# EAGLE board Zcontrol5XR2 (EAGLE 5.10)
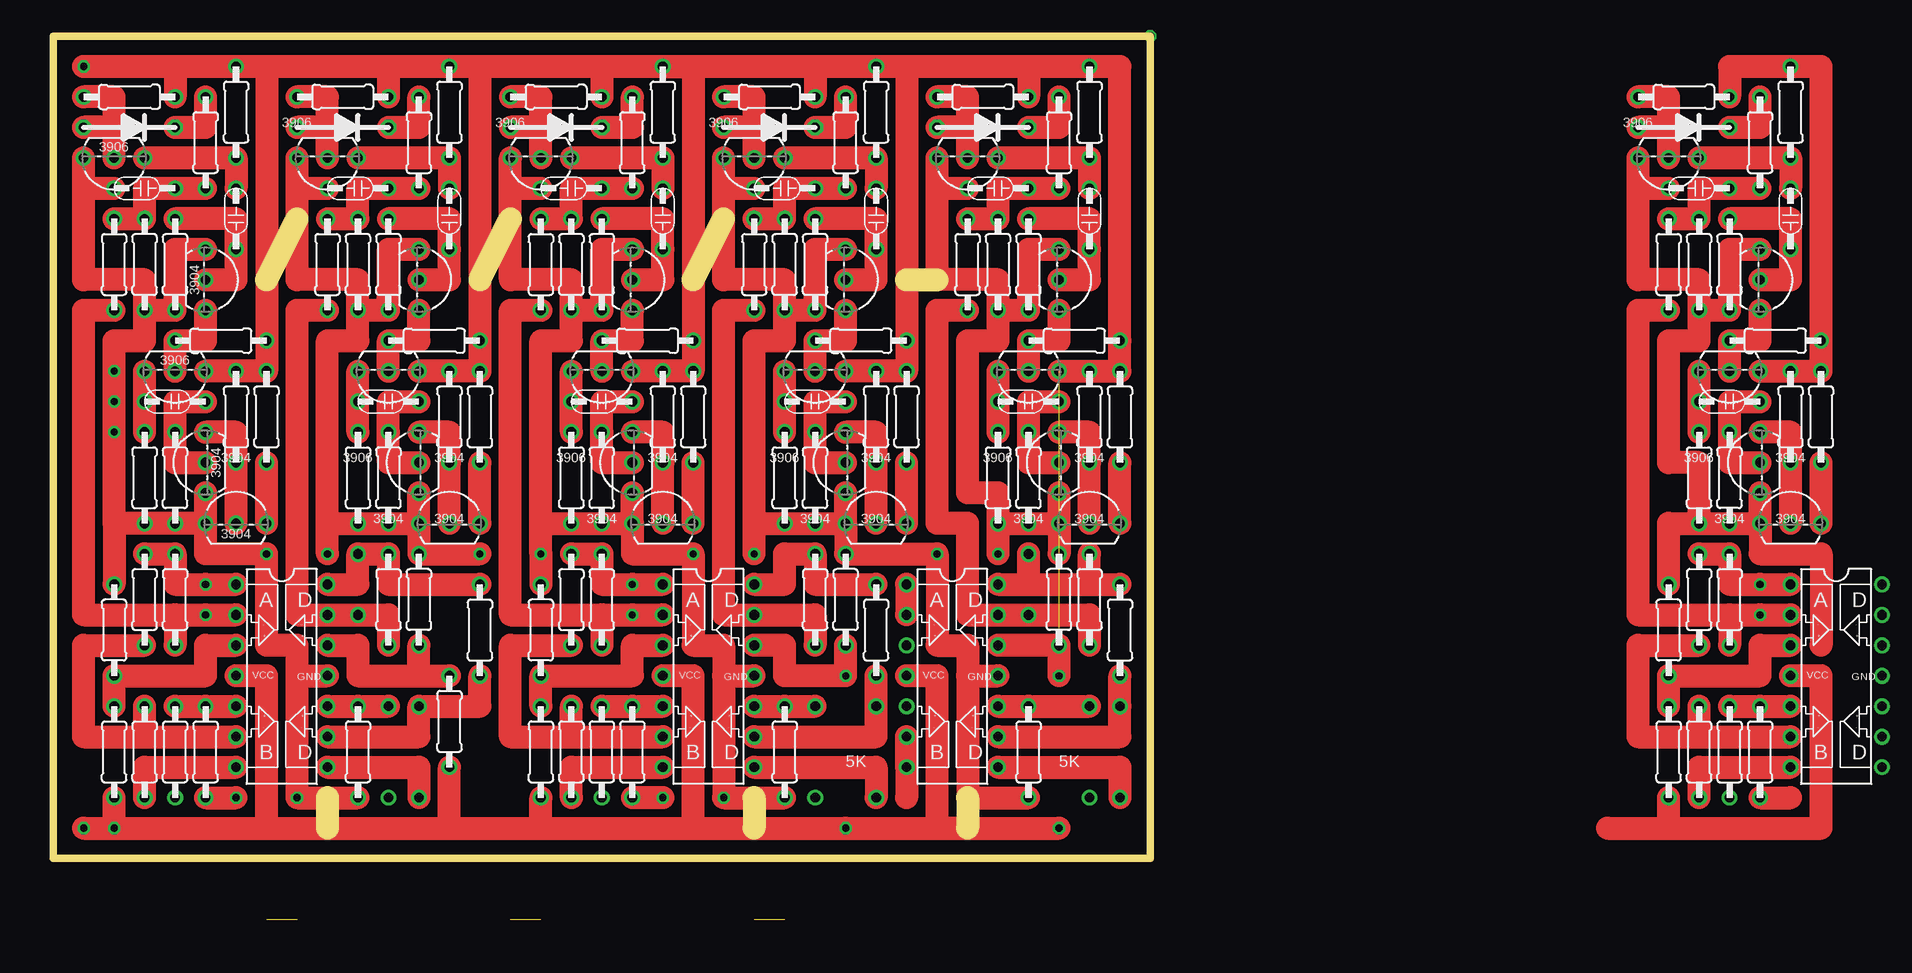
[diagram p0: board, top side]
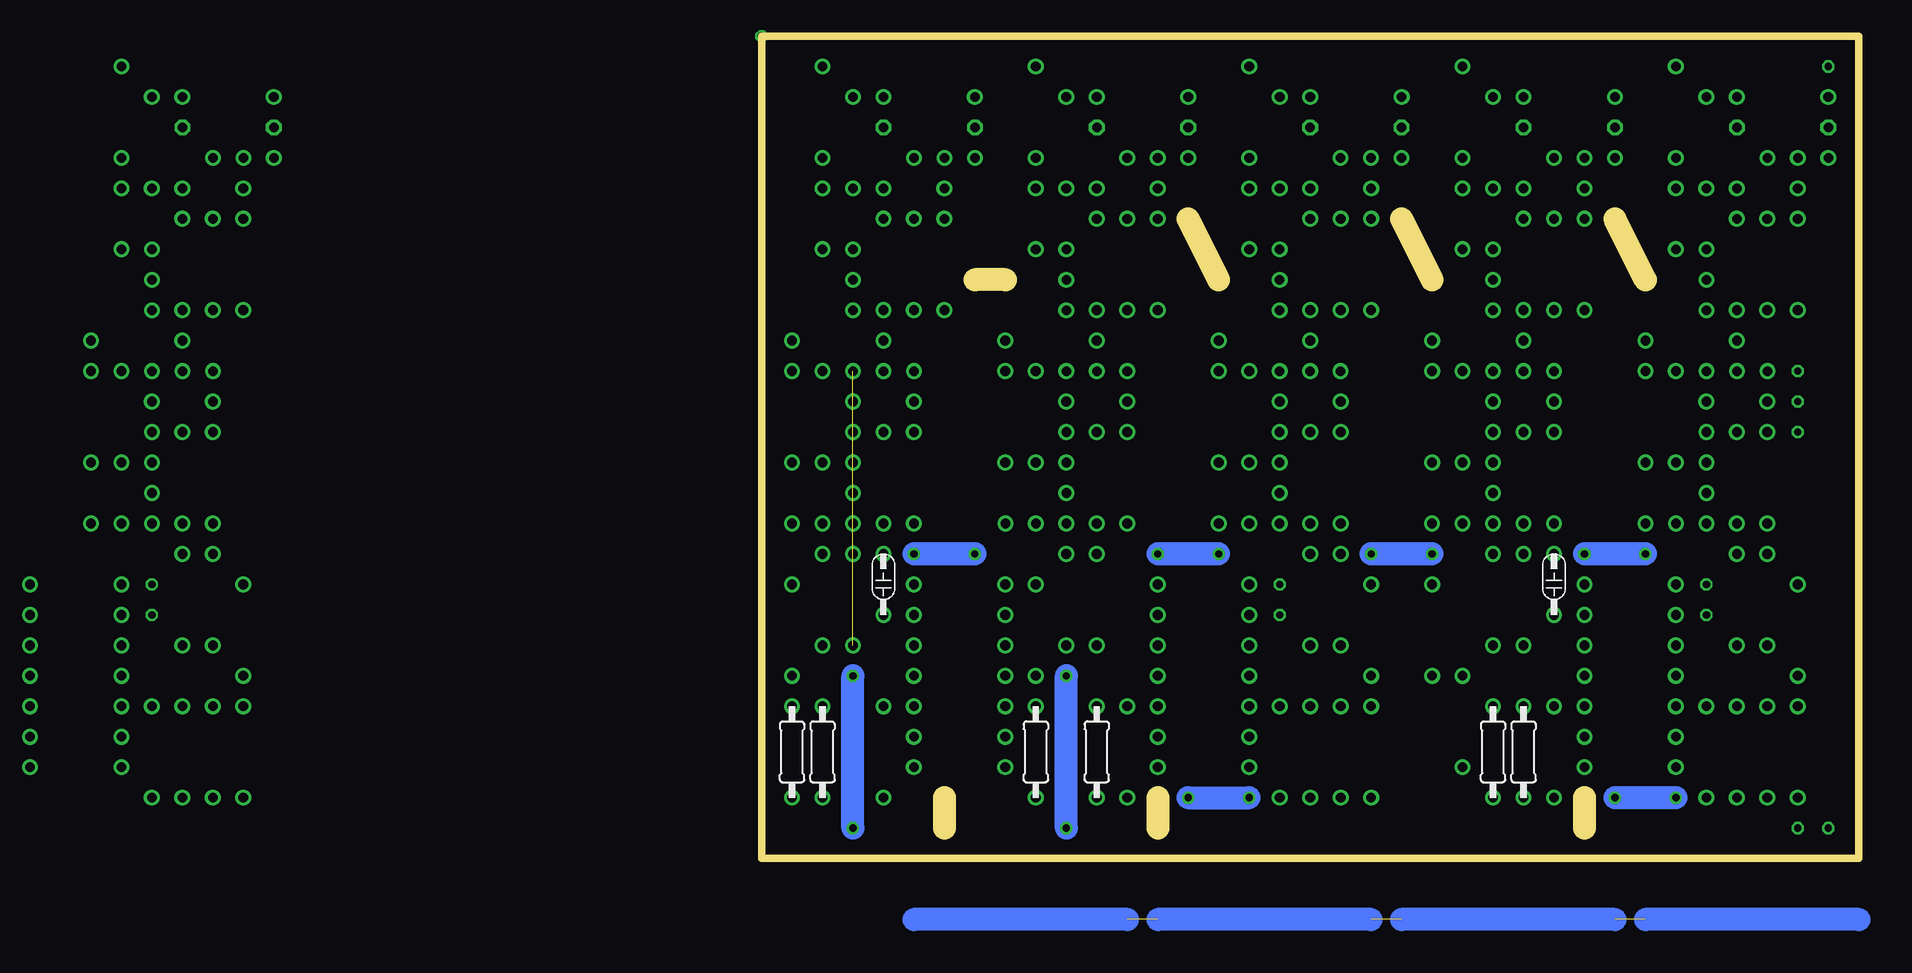
[diagram p1: board, bottom side, seen from below]

Size 91.44 x 68.58 mm. Coordinates in mm from the lower left corner, seen from the top.
Outline: 91.44,0 91.44,68.58 0,68.58 0,0 91.44,0
Copper layers (1*16): Top 0.035mm / dielectric 1.5mm / Bottom 0.035mm
Design rules "default": minimum track width 10mil, minimum drill 24mil, track to track 8mil, track to pad 8mil, pad to pad 8mil, via to via 8mil, smd to smd 8mil, copper to edge 40mil, drill to drill 8mil, minimum pad ring 10mil, minimum via ring 8mil, stop-mask expansion 4mil, vias tented up to drill 0mil, thermal gap 10mil
Milling: 7 lines

## Footprints (pad centres in the part's own frame; a part is rotated, then mirrored left to right if it is on the bottom)
SMALL-CAPACITOR = drill 0.813 round: IN1 0,0; IN2 5.08,0
TRANSISTOR = drill 0.8 round: P$1 0,0; P$2 2.54,0; P$3 -2.54,0
DIODE = drill 0.8 octagon: P$1 -3.81,0; P$2 3.81,0
RESISTOR = drill 0.813 round: IN1 -3.81,0; IN2 3.81,0
LM324-QUAD-OPAMP = drill 0.813 round: AMINUS -3.81,5.08; AOUT -3.81,7.62; APLUS -3.81,2.54; BMINUS -3.81,-5.08; BOUT -3.81,-7.62; BPLUS -3.81,-2.54; CMINUS 3.81,5.08; COUT 3.81,7.62; CPLUS 3.81,2.54; DMINUS 3.81,-5.08; DOUT 3.81,-7.62; DPLUS 3.81,-2.54; GND 3.81,0; VCC -3.81,0
CAPACITOR = drill 0.813 round: IN1 -2.54,0; IN2 5.08,0

## Placement (x,y rotation side)
E$1  [SMALL-CAPACITOR]  35.56,-36.83 270 top  (outside the outline)
E$2  50nF  [SMALL-CAPACITOR]  25.4,20.32 90 bottom
E$3  [TRANSISTOR]  5.08,58.42 180 top
E$4  [TRANSISTOR]  81.28,-39.37 90 top  (outside the outline)
E$5  [DIODE]  6.35,60.96 0 top
E$6  2k  [RESISTOR]  85.09,-31.75 0 top  (outside the outline)
E$7  4k  [RESISTOR]  6.35,63.5 180 top
E$8  10k  [RESISTOR]  87.63,-34.29 0 top  (outside the outline)
E$9  910  [RESISTOR]  12.7,59.69 270 top
E$10  2.2uF  [SMALL-CAPACITOR]  10.16,55.88 180 top
E$11  [LM324-QUAD-OPAMP]  19.05,15.24 0 top
E$12  [RESISTOR]  38.1,-38.1 270 top  (outside the outline)
E$13  [RESISTOR]  50.8,-38.1 270 top  (outside the outline)
E$14  [CAPACITOR]  35.56,-31.75 90 top  (outside the outline)
E$15  100k  [RESISTOR]  7.62,49.53 90 top
E$16  100k  [RESISTOR]  5.08,49.53 270 top
E$17  [CAPACITOR]  53.34,-31.75 90 top  (outside the outline)
E$18  [TRANSISTOR]  22.86,58.42 180 top
E$19  200k  [RESISTOR]  10.16,21.59 270 top
E$20  2k  [RESISTOR]  5.08,19.05 90 top
E$21  5k  [RESISTOR]  5.08,8.89 270 top
E$22  2k  [RESISTOR]  7.62,21.59 270 top
E$23  2k  [RESISTOR]  7.62,8.89 270 top
E$24  [LM324-QUAD-OPAMP]  24.13,-36.83 180 top  (outside the outline)
E$25  [RESISTOR]  17.78,-38.1 270 top  (outside the outline)
E$26  [RESISTOR]  30.48,-38.1 270 top  (outside the outline)
E$27  [CAPACITOR]  15.24,-31.75 90 top  (outside the outline)
E$28  [CAPACITOR]  33.02,-31.75 90 top  (outside the outline)
E$29  2k  [RESISTOR]  12.7,8.89 270 top
E$30  20k  [RESISTOR]  10.16,8.89 270 top
E$31  10K  [RESISTOR]  15.24,62.23 270 top
E$32  500Pf  [SMALL-CAPACITOR]  15.24,50.8 90 top
E$33  100K  [RESISTOR]  10.16,49.53 90 top
E$34  [TRANSISTOR]  12.7,48.26 270 top
E$35  2k  [RESISTOR]  13.97,43.18 0 top
E$36  [TRANSISTOR]  10.16,40.64 180 top
E$37  22Pf  [SMALL-CAPACITOR]  12.7,38.1 180 top
E$38  4k  [RESISTOR]  24.13,63.5 180 top
E$39  2k  [RESISTOR]  69.85,-29.21 180 top  (outside the outline)
E$40  100k  [RESISTOR]  10.16,31.75 90 top
E$41  10k  [RESISTOR]  87.63,-39.37 0 top  (outside the outline)
E$42  10k  [RESISTOR]  87.63,-36.83 0 top  (outside the outline)
E$43  [TRANSISTOR]  12.7,33.02 90 top
E$44  2k  [RESISTOR]  15.24,36.83 90 top
E$45  [TRANSISTOR]  15.24,27.94 0 top
E$46  2k  [RESISTOR]  17.78,36.83 90 top
E$47  200k  [RESISTOR]  27.94,21.59 270 top
E$48  2k  [RESISTOR]  30.48,21.59 90 top
E$49  5k  [RESISTOR]  33.02,11.43 270 top
E$50  2k  [RESISTOR]  35.56,19.05 270 top
E$51  [CAPACITOR]  73.66,-34.29 270 top  (outside the outline)
E$52  2k  [RESISTOR]  30.48,8.89 270 bottom
E$53  2k  [RESISTOR]  25.4,8.89 270 top
E$54  20k  [RESISTOR]  27.94,8.89 270 bottom
E$55  [DIODE]  24.13,60.96 0 top
E$56  910  [RESISTOR]  30.48,59.69 270 top
E$57  2.2uF  [SMALL-CAPACITOR]  27.94,55.88 180 top
E$58  100k  [RESISTOR]  25.4,49.53 90 top
E$59  100k  [RESISTOR]  22.86,49.53 270 top
E$60  10K  [RESISTOR]  33.02,62.23 270 top
E$61  500Pf  [SMALL-CAPACITOR]  33.02,50.8 90 top
E$62  100K  [RESISTOR]  27.94,49.53 90 top
E$63  [TRANSISTOR]  30.48,48.26 270 top
E$64  2k  [RESISTOR]  31.75,43.18 0 top
E$65  [TRANSISTOR]  27.94,40.64 180 top
E$66  100k  [RESISTOR]  27.94,31.75 90 top
E$67  [TRANSISTOR]  30.48,33.02 90 top
E$68  2k  [RESISTOR]  33.02,36.83 90 top
E$69  [TRANSISTOR]  33.02,27.94 0 top
E$70  2k  [RESISTOR]  35.56,36.83 90 top
E$71  2k  [RESISTOR]  25.4,31.75 270 top
E$72  22Pf  [SMALL-CAPACITOR]  30.48,38.1 180 top
E$73  [LM324-QUAD-OPAMP]  54.61,15.24 0 top
E$74  [TRANSISTOR]  40.64,58.42 180 top
E$75  2k  [RESISTOR]  7.62,31.75 270 top
E$76  4k  [RESISTOR]  41.91,63.5 180 top
E$77  [DIODE]  41.91,60.96 0 top
E$78  910  [RESISTOR]  48.26,59.69 270 top
E$79  2.2uF  [SMALL-CAPACITOR]  45.72,55.88 180 top
E$80  100k  [RESISTOR]  43.18,49.53 90 top
E$81  100k  [RESISTOR]  40.64,49.53 270 top
E$82  200k  [RESISTOR]  45.72,21.59 270 top
E$83  2k  [RESISTOR]  40.64,19.05 90 top
E$84  5k  [RESISTOR]  40.64,8.89 270 top
E$85  2k  [RESISTOR]  43.18,21.59 270 top
E$86  2k  [RESISTOR]  43.18,8.89 270 top
E$87  2k  [RESISTOR]  48.26,8.89 270 top
E$88  20k  [RESISTOR]  45.72,8.89 270 top
E$89  10K  [RESISTOR]  50.8,62.23 270 top
E$90  500Pf  [SMALL-CAPACITOR]  50.8,50.8 90 top
E$91  100K  [RESISTOR]  45.72,49.53 90 top
E$92  [TRANSISTOR]  48.26,48.26 270 top
E$93  2k  [RESISTOR]  49.53,43.18 0 top
E$94  [TRANSISTOR]  45.72,40.64 180 top
E$95  100k  [RESISTOR]  45.72,31.75 90 top
E$96  [TRANSISTOR]  48.26,33.02 90 top
E$97  2k  [RESISTOR]  50.8,36.83 90 top
E$98  [TRANSISTOR]  50.8,27.94 0 top
E$99  2k  [RESISTOR]  53.34,36.83 90 top
E$100  200k  [RESISTOR]  86.36,21.59 270 top
E$101  200k  [RESISTOR]  63.5,21.59 270 top
E$102  2k  [RESISTOR]  66.04,21.59 90 top
E$103  [SMALL-CAPACITOR]  30.48,76.2 66.6 top  (outside the outline)
E$104  2k  [RESISTOR]  68.58,19.05 270 top
E$105  2k  [RESISTOR]  68.58,8.89 270 bottom
E$106  2k  [RESISTOR]  60.96,8.89 270 top
E$107  20k  [RESISTOR]  63.5,8.89 270 bottom
E$108  2k  [RESISTOR]  43.18,31.75 270 top
E$109  22Pf  [SMALL-CAPACITOR]  48.26,38.1 180 top
E$110  [TRANSISTOR]  58.42,58.42 180 top
E$111  4k  [RESISTOR]  59.69,63.5 180 top
E$112  [DIODE]  59.69,60.96 0 top
E$113  910  [RESISTOR]  66.04,59.69 270 top
E$114  2.2uF  [SMALL-CAPACITOR]  63.5,55.88 180 top
E$115  100k  [RESISTOR]  60.96,49.53 90 top
E$116  100k  [RESISTOR]  58.42,49.53 270 top
E$117  10K  [RESISTOR]  68.58,62.23 270 top
E$118  500Pf  [SMALL-CAPACITOR]  68.58,50.8 90 top
E$119  100K  [RESISTOR]  63.5,49.53 90 top
E$120  [TRANSISTOR]  66.04,48.26 270 top
E$121  2k  [RESISTOR]  67.31,43.18 0 top
E$122  [TRANSISTOR]  63.5,40.64 180 top
E$123  100k  [RESISTOR]  63.5,31.75 90 top
E$124  [TRANSISTOR]  66.04,33.02 90 top
E$125  2k  [RESISTOR]  68.58,36.83 90 top
E$126  [TRANSISTOR]  68.58,27.94 0 top
E$127  2k  [RESISTOR]  71.12,36.83 90 top
E$128  2k  [RESISTOR]  60.96,31.75 270 top
E$129  22Pf  [SMALL-CAPACITOR]  66.04,38.1 180 top
E$130  [LM324-QUAD-OPAMP]  148.59,15.24 0 top  (outside the outline)
E$131  [TRANSISTOR]  134.62,58.42 180 top  (outside the outline)
E$132  4k  [RESISTOR]  135.89,63.5 180 top  (outside the outline)
E$133  [DIODE]  135.89,60.96 0 top  (outside the outline)
E$134  910  [RESISTOR]  142.24,59.69 270 top  (outside the outline)
E$135  2.2uF  [SMALL-CAPACITOR]  139.7,55.88 180 top  (outside the outline)
E$136  100k  [RESISTOR]  137.16,49.53 90 top  (outside the outline)
E$137  100k  [RESISTOR]  134.62,49.53 270 top  (outside the outline)
E$138  200k  [RESISTOR]  139.7,21.59 270 top  (outside the outline)
E$139  2k  [RESISTOR]  134.62,19.05 90 top  (outside the outline)
E$140  5k  [RESISTOR]  134.62,8.89 270 top  (outside the outline)
E$141  2k  [RESISTOR]  137.16,21.59 270 top  (outside the outline)
E$142  2k  [RESISTOR]  137.16,8.89 270 top  (outside the outline)
E$143  2k  [RESISTOR]  142.24,8.89 270 top  (outside the outline)
E$144  20k  [RESISTOR]  139.7,8.89 270 top  (outside the outline)
E$145  10K  [RESISTOR]  144.78,62.23 270 top  (outside the outline)
E$146  500Pf  [SMALL-CAPACITOR]  144.78,50.8 90 top  (outside the outline)
E$147  100K  [RESISTOR]  139.7,49.53 90 top  (outside the outline)
E$148  [TRANSISTOR]  142.24,48.26 270 top  (outside the outline)
E$149  2k  [RESISTOR]  143.51,43.18 0 top  (outside the outline)
E$150  [TRANSISTOR]  139.7,40.64 180 top  (outside the outline)
E$151  100k  [RESISTOR]  139.7,31.75 90 top  (outside the outline)
E$152  [TRANSISTOR]  142.24,33.02 90 top  (outside the outline)
E$153  2k  [RESISTOR]  144.78,36.83 90 top  (outside the outline)
E$154  [TRANSISTOR]  144.78,27.94 0 top  (outside the outline)
E$155  2k  [RESISTOR]  147.32,36.83 90 top  (outside the outline)
E$156  [LM324-QUAD-OPAMP]  74.93,15.24 0 top
E$157  50nF  [SMALL-CAPACITOR]  81.28,20.32 90 bottom
E$159  2k  [RESISTOR]  83.82,21.59 90 top
E$161  2k  [RESISTOR]  88.9,19.05 270 top
E$162  2k  [RESISTOR]  88.9,8.89 270 bottom
E$163  2k  [RESISTOR]  81.28,8.89 270 top
E$164  2k  [RESISTOR]  137.16,31.75 270 top  (outside the outline)
E$165  22Pf  [SMALL-CAPACITOR]  142.24,38.1 180 top  (outside the outline)
E$166  20k  [RESISTOR]  86.36,8.89 270 bottom
E$167  [TRANSISTOR]  76.2,58.42 180 top
E$168  4k  [RESISTOR]  77.47,63.5 180 top
E$169  [DIODE]  77.47,60.96 0 top
E$170  910  [RESISTOR]  83.82,59.69 270 top
E$171  2.2uF  [SMALL-CAPACITOR]  81.28,55.88 180 top
E$172  100k  [RESISTOR]  78.74,49.53 90 top
E$173  100k  [RESISTOR]  76.2,49.53 270 top
E$174  10K  [RESISTOR]  86.36,62.23 270 top
E$175  500Pf  [SMALL-CAPACITOR]  86.36,50.8 90 top
E$176  100K  [RESISTOR]  81.28,49.53 90 top
E$177  [TRANSISTOR]  83.82,48.26 270 top
E$178  2k  [RESISTOR]  85.09,43.18 0 top
E$179  [TRANSISTOR]  81.28,40.64 180 top
E$180  100k  [RESISTOR]  81.28,31.75 90 top
E$181  [TRANSISTOR]  83.82,33.02 90 top
E$182  2k  [RESISTOR]  86.36,36.83 90 top
E$183  [TRANSISTOR]  86.36,27.94 0 top
E$184  2k  [RESISTOR]  88.9,36.83 90 top
E$185  2k  [RESISTOR]  78.74,31.75 270 top
E$186  22Pf  [SMALL-CAPACITOR]  83.82,38.1 180 top

## Library data of the parts
E$1-E$157 E$159 E$161-E$186 = RussellLibrary

## Nets
GND3: E$131.P$2 E$135.IN2 E$136.IN1 E$139.IN2 E$147.IN1 E$148.P$3 E$151.IN1 E$152.P$3 E$154.P$3
GND4: E$3.P$2 E$10.IN2 E$11.GND E$15.IN1 E$18.P$2 E$20.IN2 E$29.IN2 E$33.IN1 E$34.P$3 E$40.IN1 E$43.P$3 E$45.P$3 E$48.IN2 E$53.IN2 E$57.IN2 E$58.IN1 E$62.IN1 E$63.P$3 E$66.IN1 E$67.P$3 E$69.P$3 E$73.GND E$74.P$2 E$79.IN2 E$80.IN1 E$83.IN2 E$87.IN2 E$91.IN1 E$92.P$3 E$95.IN1 E$96.P$3 E$98.P$3 E$102.IN2 E$106.IN2 E$110.P$2 E$114.IN2 E$115.IN1 E$119.IN1 E$120.P$3 E$123.IN1 E$124.P$3 E$126.P$3 E$156.GND E$159.IN2 E$163.IN2 E$167.P$2 E$171.IN2 E$172.IN1 E$176.IN1 E$177.P$3 E$180.IN1 E$181.P$3 E$183.P$3
S$1: E$3.P$1 E$5.P$1 E$7.IN2
S$2: E$5.P$2 E$9.IN1
S$4: E$9.IN2 E$10.IN1 E$15.IN2 E$16.IN1
S$5: E$11.AMINUS E$16.IN2 E$19.IN2
S$6: E$32.IN1 E$33.IN2 E$34.P$1
S$7: E$11.APLUS E$20.IN1 E$21.IN1
S$8: E$11.AOUT E$19.IN1 E$22.IN1
S$9: E$18.P$1 E$38.IN2 E$55.P$1
S$10: E$11.BMINUS E$22.IN2 E$23.IN1
S$11: E$11.BOUT E$23.IN2
S$12: E$11.BPLUS E$29.IN1 E$30.IN1
S$13: E$30.IN2
S$14: E$3.P$3 E$31.IN2 E$32.IN2
S$15: E$47.IN2 E$59.IN2
S$16: E$2.IN2 E$47.IN1 E$50.IN1
S$17: E$34.P$2 E$35.IN1 E$36.P$1
S$18: E$50.IN2 E$52.IN1
S$19: E$36.P$2 E$75.IN1
S$20: E$37.IN1 E$40.IN2 E$43.P$1
S$21: E$8.IN2 E$42.IN2
S$22: E$52.IN2
S$23: E$43.P$2 E$44.IN1 E$45.P$1
S$24: E$45.P$2 E$46.IN1
S$26: E$53.IN1 E$54.IN1
S$27: E$54.IN2
S$28: E$55.P$2 E$56.IN1
S$29: E$74.P$1 E$76.IN2 E$77.P$1
S$30: E$11.CPLUS E$48.IN1 E$49.IN1
S$31: E$18.P$3 E$60.IN2 E$61.IN2
S$32: E$61.IN1 E$62.IN2 E$63.P$1
S$33: E$63.P$2 E$64.IN1 E$65.P$1
S$34: E$66.IN2 E$67.P$1 E$72.IN1
S$35: E$67.P$2 E$68.IN1 E$69.P$1
S$36: E$69.P$2 E$70.IN1
S$37: E$65.P$2 E$71.IN1
S$38: E$56.IN2 E$57.IN1 E$58.IN2 E$59.IN1
S$39: E$77.P$2 E$78.IN1
S$40: E$73.AMINUS E$81.IN2 E$82.IN2
S$41: E$73.APLUS E$83.IN1 E$84.IN1
S$42: E$73.AOUT E$82.IN1 E$85.IN1
S$43: E$73.BMINUS E$85.IN2 E$86.IN1
S$44: E$73.BOUT E$86.IN2
S$45: E$73.BPLUS E$87.IN1 E$88.IN1
S$46: E$88.IN2
S$47: E$74.P$3 E$89.IN2 E$90.IN2
S$48: E$90.IN1 E$91.IN2 E$92.P$1
S$49: E$92.P$2 E$93.IN1 E$94.P$1
S$50: E$95.IN2 E$96.P$1 E$109.IN1
S$51: E$96.P$2 E$97.IN1 E$98.P$1
S$52: E$98.P$2 E$99.IN1
S$53: E$94.P$2 E$108.IN1
S$54: E$78.IN2 E$79.IN1 E$80.IN2 E$81.IN1
S$55: E$101.IN1 E$104.IN1
S$56: E$104.IN2 E$105.IN1
S$57: E$105.IN2
S$58: E$106.IN1 E$107.IN1
S$59: E$107.IN2
S$60: E$101.IN2 E$116.IN2
S$61: E$100.IN2 E$173.IN2
S$62: E$110.P$1 E$111.IN2 E$112.P$1
S$63: E$112.P$2 E$113.IN1
S$64: E$110.P$3 E$117.IN2 E$118.IN2
S$65: E$118.IN1 E$119.IN2 E$120.P$1
S$66: E$120.P$2 E$121.IN1 E$122.P$1
S$67: E$123.IN2 E$124.P$1 E$129.IN1
S$68: E$124.P$2 E$125.IN1 E$126.P$1
S$69: E$126.P$2 E$127.IN1
S$70: E$122.P$2 E$128.IN1
S$71: E$113.IN2 E$114.IN1 E$115.IN2 E$116.IN1
S$72: E$131.P$1 E$132.IN2 E$133.P$1
S$73: E$133.P$2 E$134.IN1
S$74: E$130.AMINUS E$137.IN2 E$138.IN2
S$75: E$130.APLUS E$139.IN1 E$140.IN1
S$76: E$130.AOUT E$138.IN1 E$141.IN1
S$77: E$130.BMINUS E$141.IN2 E$142.IN1
S$78: E$130.BOUT E$142.IN2
S$79: E$130.BPLUS E$143.IN1 E$144.IN1
S$80: E$144.IN2
S$81: E$131.P$3 E$145.IN2 E$146.IN2
S$82: E$146.IN1 E$147.IN2 E$148.P$1
S$83: E$148.P$2 E$149.IN1 E$150.P$1
S$84: E$151.IN2 E$152.P$1 E$165.IN1
S$85: E$152.P$2 E$153.IN1 E$154.P$1
S$86: E$154.P$2 E$155.IN1
S$87: E$150.P$2 E$164.IN1
S$88: E$134.IN2 E$135.IN1 E$136.IN2 E$137.IN1
S$89: E$100.IN1 E$157.IN2 E$161.IN1
S$90: E$161.IN2 E$162.IN1
S$91: E$162.IN2
S$92: E$163.IN1 E$166.IN1
S$93: E$166.IN2
S$94: E$156.AMINUS E$156.AOUT
S$95: E$156.BMINUS E$156.BOUT
S$96: E$167.P$1 E$168.IN2 E$169.P$1
S$97: E$169.P$2 E$170.IN1
S$98: E$167.P$3 E$174.IN2 E$175.IN2
S$99: E$175.IN1 E$176.IN2 E$177.P$1
S$100: E$177.P$2 E$178.IN1 E$179.P$1
S$101: E$180.IN2 E$181.P$1 E$186.IN1
S$102: E$181.P$2 E$182.IN1 E$183.P$1
S$103: E$183.P$2 E$184.IN1
S$104: E$179.P$2 E$185.IN1
S$105: E$170.IN2 E$171.IN1 E$172.IN2 E$173.IN1
S$152: E$130.VCC E$140.IN2
S$157: E$143.IN2
VCC2: E$7.IN1 E$11.VCC E$21.IN2 E$31.IN1 E$35.IN2 E$36.P$3 E$38.IN1 E$44.IN2 E$46.IN2 E$49.IN2 E$60.IN1 E$64.IN2 E$65.P$3 E$68.IN2 E$70.IN2 E$73.CPLUS E$73.VCC E$76.IN1 E$84.IN2 E$89.IN1 E$93.IN2 E$94.P$3 E$97.IN2 E$99.IN2 E$102.IN1 E$111.IN1 E$117.IN1 E$121.IN2 E$122.P$3 E$125.IN2 E$127.IN2 E$156.CPLUS E$156.VCC E$159.IN1 E$168.IN1 E$174.IN1 E$178.IN2 E$179.P$3 E$182.IN2 E$184.IN2
VCC3: E$132.IN1 E$145.IN1 E$149.IN2 E$150.P$3 E$153.IN2 E$155.IN2

## Tracks (layer width: path | path; a pad name or v marks a point on that pad's centre or on a via)
GND3
  Top 1.93: 132.08,55.88 E$131.P$2 | 132.08,55.88 E$135.IN2 | 132.08,55.88 132.08,48.26 137.16,48.26 E$136.IN1 | E$148.P$3 139.7,50.8 E$147.IN1 E$136.IN1 | E$136.IN1 137.16,43.18 134.62,43.18 134.62,33.02 137.16,33.02 137.16,27.94 | 147.32,17.78 147.32,25.4 142.24,25.4 E$154.P$3 | E$154.P$3 E$152.P$3 | E$154.P$3 E$151.IN1 137.16,27.94 | 137.16,27.94 134.62,27.94 E$139.IN2
GND4  (via drill 0.6)
  Top 1.93: 73.66,55.88 E$167.P$2 | 73.66,55.88 v73.66,48.26 78.74,48.26 E$172.IN1 | 73.66,55.88 E$171.IN2 | E$172.IN1 E$176.IN1 81.28,50.8 E$177.P$3 | E$172.IN1 78.74,43.18 76.2,43.18 76.2,30.48 78.74,30.48 78.74,27.94 | 78.74,27.94 E$180.IN1 E$183.P$3 | E$183.P$3 E$181.P$3 | E$183.P$3 E$159.IN2 | 76.2,15.24 E$156.GND | 76.2,15.24 76.2,17.78 73.66,17.78 v73.66,25.4 E$102.IN2 E$126.P$3 | E$163.IN2 v76.2,5.08 76.2,15.24 | v78.74,25.4 78.74,27.94 | 55.88,55.88 E$110.P$2 | 55.88,55.88 v55.88,53.34 55.88,48.26 60.96,48.26 E$115.IN1 | 55.88,55.88 E$114.IN2 | E$115.IN1 E$119.IN1 63.5,50.8 E$120.P$3 | E$115.IN1 60.96,43.18 58.42,43.18 58.42,27.94 | E$126.P$3 E$124.P$3 | E$126.P$3 E$123.IN1 58.42,27.94 | 38.1,55.88 E$74.P$2 | 38.1,55.88 v38.1,53.34 38.1,48.26 43.18,48.26 E$80.IN1 | 38.1,55.88 E$79.IN2 | E$80.IN1 E$91.IN1 45.72,50.8 E$92.P$3 | E$80.IN1 43.18,43.18 40.64,43.18 40.64,27.94 | 40.64,27.94 v40.64,25.4 E$83.IN2 | E$98.P$3 E$96.P$3 | E$98.P$3 E$95.IN1 40.64,27.94 | 55.88,15.24 E$73.GND | 55.88,15.24 55.88,17.78 53.34,17.78 v53.34,25.4 48.26,25.4 E$98.P$3 | E$106.IN2 v58.42,5.08 v55.88,5.08 55.88,15.24 | v50.8,5.08 E$87.IN2 | v58.42,25.4 58.42,27.94 | 20.32,55.88 E$18.P$2 | 20.32,55.88 v20.32,53.34 20.32,48.26 25.4,48.26 E$58.IN1 | 20.32,55.88 E$57.IN2 | E$58.IN1 E$62.IN1 27.94,50.8 E$63.P$3 | E$58.IN1 25.4,43.18 22.86,43.18 22.86,27.94 | E$69.P$3 E$67.P$3 | E$69.P$3 E$66.IN1 22.86,27.94 | E$69.P$3 E$48.IN2 v35.56,25.4 | 2.54,55.88 E$3.P$2 | 2.54,55.88 2.54,48.26 7.62,48.26 E$15.IN1 | 2.54,55.88 E$10.IN2 | E$15.IN1 E$33.IN1 10.16,50.8 E$34.P$3 | E$15.IN1 7.62,43.18 5.08,43.18 v5.08,40.64 v5.08,38.1 v5.08,35.56 5.08,27.94
  Top 1.93: 5.08,27.94 E$20.IN2 | E$45.P$3 E$43.P$3 | E$45.P$3 E$40.IN1 5.08,27.94 | 20.32,15.24 E$11.GND | 20.32,15.24 20.32,17.78 17.78,17.78 v17.78,25.4 12.7,25.4 E$45.P$3 | E$53.IN2 v22.86,5.08 v20.32,5.08 20.32,15.24 | E$29.IN2 v15.24,5.08 | v22.86,25.4 22.86,27.94
  Bottom 1.93: v73.66,25.4 v78.74,25.4 | v53.34,25.4 v58.42,25.4 | v55.88,5.08 v50.8,5.08 | v35.56,25.4 v40.64,25.4 | v17.78,25.4 v22.86,25.4 | v15.24,5.08 v20.32,5.08
S$1
  Top 1.93: E$7.IN2 5.08,63.5 5.08,60.96 | E$3.P$1 5.08,60.96 | 5.08,60.96 E$5.P$1
S$2
  Top 1.93: E$5.P$2 12.7,60.96 E$9.IN1
S$3  (3 unrouted)
  Bottom 1.93: 0,-5.08 17.78,-5.08 | 20.32,-5.08 38.1,-5.08 | 40.64,-5.08 58.42,-5.08 | 60.96,-5.08 78.74,-5.08
S$4
  Top 1.93: E$9.IN2 E$10.IN1 7.62,55.88 E$15.IN2 E$16.IN1
S$5  (via drill 0.6)
  Top 1.93: E$16.IN2 2.54,45.72 2.54,20.32 10.16,20.32 | 10.16,20.32 v12.7,20.32 E$11.AMINUS | 10.16,20.32 E$19.IN2
S$6
  Top 1.93: E$33.IN2 15.24,53.34 E$32.IN1 15.24,48.26 E$34.P$1
S$7
  Top 1.93: E$11.APLUS 12.7,17.78 12.7,15.24 E$20.IN1 E$21.IN1
S$8  (via drill 0.6)
  Top 1.93: E$11.AOUT v12.7,22.86 10.16,22.86 E$19.IN1 E$22.IN1
S$9
  Top 1.93: E$38.IN2 22.86,63.5 22.86,60.96 | E$18.P$1 22.86,60.96 | 22.86,60.96 E$55.P$1
S$10
  Top 1.93: 7.62,10.16 E$11.BMINUS | 7.62,10.16 2.54,10.16 2.54,17.78 E$22.IN2 | 7.62,10.16 E$23.IN1
S$11
  Top 1.93: E$23.IN2 7.62,7.62 E$11.BOUT
S$12
  Top 1.93: E$11.BPLUS E$29.IN1 E$30.IN1
S$14
  Top 1.93: E$3.P$3 E$31.IN2 E$32.IN2
S$15
  Top 1.93: E$47.IN2 27.94,20.32 20.32,20.32 20.32,45.72 E$59.IN2
S$16
  Top 1.93: 22.86,22.86 25.4,22.86 E$2.IN2 E$47.IN1 27.94,22.86 E$50.IN1
S$17
  Top 1.93: E$36.P$1 E$35.IN1 12.7,43.18 E$34.P$2
S$18
  Top 1.93: 22.86,10.16 30.48,10.16 E$52.IN1 35.56,12.7 E$50.IN2
S$19
  Top 1.93: E$75.IN1 E$36.P$2
S$20
  Top 1.93: E$43.P$1 10.16,33.02 E$40.IN2 10.16,38.1 E$37.IN1
S$21  (1 unrouted)
S$22
  Top 1.93: E$52.IN2 30.48,7.62 22.86,7.62
S$23
  Top 1.93: E$45.P$1 E$44.IN1 15.24,35.56 E$43.P$2
S$24
  Top 1.93: E$45.P$2 E$46.IN1
S$25  (via drill 0.6)
  other vias: 91.44,68.58
S$26
  Top 1.93: 22.86,12.7 E$53.IN1 E$54.IN1
S$28
  Top 1.93: E$55.P$2 30.48,60.96 E$56.IN1
S$29
  Top 1.93: E$76.IN2 40.64,63.5 40.64,60.96 | E$74.P$1 40.64,60.96 | 40.64,60.96 E$77.P$1
S$30
  Top 1.93: 30.48,15.24 E$48.IN1 | 30.48,15.24 25.4,15.24 25.4,17.78 E$11.CPLUS | 30.48,15.24 E$49.IN1
S$31
  Top 1.93: E$18.P$3 E$60.IN2 E$61.IN2
S$32
  Top 1.93: E$62.IN2 33.02,53.34 E$61.IN1 33.02,48.26 E$63.P$1
S$33
  Top 1.93: E$65.P$1 E$64.IN1 30.48,43.18 E$63.P$2
S$34
  Top 1.93: E$67.P$1 27.94,33.02 E$66.IN2 27.94,38.1 E$72.IN1
S$35
  Top 1.93: E$69.P$1 E$68.IN1 33.02,35.56 E$67.P$2
S$36
  Top 1.93: E$69.P$2 E$70.IN1
S$37
  Top 1.93: E$71.IN1 E$65.P$2
S$38
  Top 1.93: E$56.IN2 E$57.IN1 25.4,55.88 E$58.IN2 E$59.IN1
S$39
  Top 1.93: E$77.P$2 48.26,60.96 E$78.IN1
S$40  (via drill 0.6)
  Top 1.93: E$81.IN2 38.1,45.72 38.1,20.32 45.72,20.32 | 45.72,20.32 v48.26,20.32 E$73.AMINUS | 45.72,20.32 E$82.IN2
S$41
  Top 1.93: E$73.APLUS 48.26,17.78 48.26,15.24 E$83.IN1 E$84.IN1
S$42  (via drill 0.6)
  Top 1.93: E$73.AOUT v48.26,22.86 45.72,22.86 E$82.IN1 E$85.IN1
S$43
  Top 1.93: 43.18,10.16 E$73.BMINUS | 43.18,10.16 38.1,10.16 38.1,17.78 E$85.IN2 | 43.18,10.16 E$86.IN1
S$44
  Top 1.93: E$86.IN2 43.18,7.62 E$73.BOUT
S$45
  Top 1.93: E$73.BPLUS E$87.IN1 E$88.IN1
S$47
  Top 1.93: E$74.P$3 E$89.IN2 E$90.IN2
S$48
  Top 1.93: E$91.IN2 50.8,53.34 E$90.IN1 50.8,48.26 E$92.P$1
S$49
  Top 1.93: E$94.P$1 E$93.IN1 48.26,43.18 E$92.P$2
S$50
  Top 1.93: E$96.P$1 45.72,33.02 E$95.IN2 45.72,38.1 E$109.IN1
S$51
  Top 1.93: E$98.P$1 E$97.IN1 50.8,35.56 E$96.P$2
S$52
  Top 1.93: E$98.P$2 E$99.IN1
S$53
  Top 1.93: E$108.IN1 E$94.P$2
S$54
  Top 1.93: E$78.IN2 E$79.IN1 43.18,55.88 E$80.IN2 E$81.IN1
S$55
  Top 1.93: 58.42,22.86 60.96,22.86 60.96,25.4 E$101.IN1 63.5,22.86 E$104.IN1
S$56
  Top 1.93: 58.42,10.16 68.58,10.16 E$105.IN1 E$104.IN2
S$57
  Top 1.93: E$105.IN2 68.58,7.62 58.42,7.62
S$58
  Top 1.93: 58.42,12.7 E$106.IN1 E$107.IN1
S$60
  Top 1.93: E$101.IN2 63.5,20.32 55.88,20.32 55.88,45.72 E$116.IN2
S$61
  Top 1.93: E$100.IN2 86.36,20.32 76.2,20.32 76.2,27.94 73.66,27.94 73.66,45.72 E$173.IN2
S$62
  Top 1.93: E$111.IN2 58.42,63.5 58.42,60.96 | E$110.P$1 58.42,60.96 | 58.42,60.96 E$112.P$1
S$63
  Top 1.93: E$112.P$2 66.04,60.96 E$113.IN1
S$64
  Top 1.93: E$110.P$3 E$117.IN2 E$118.IN2
S$65
  Top 1.93: E$119.IN2 68.58,53.34 E$118.IN1 68.58,48.26 E$120.P$1
S$66
  Top 1.93: E$122.P$1 E$121.IN1 66.04,43.18 E$120.P$2
S$67
  Top 1.93: E$124.P$1 63.5,33.02 E$123.IN2 63.5,38.1 E$129.IN1
S$68
  Top 1.93: E$126.P$1 E$125.IN1 68.58,35.56 E$124.P$2
S$69
  Top 1.93: E$126.P$2 E$127.IN1
S$70
  Top 1.93: E$128.IN1 E$122.P$2
S$71
  Top 1.93: E$113.IN2 E$114.IN1 60.96,55.88 E$115.IN2 E$116.IN1
S$72
  Top 1.93: E$132.IN2 134.62,63.5 134.62,60.96 | E$131.P$1 134.62,60.96 | 134.62,60.96 E$133.P$1
S$73
  Top 1.93: E$133.P$2 142.24,60.96 E$134.IN1
S$74  (via drill 0.6)
  Top 1.93: E$137.IN2 132.08,45.72 132.08,20.32 139.7,20.32 | 139.7,20.32 v142.24,20.32 E$130.AMINUS | 139.7,20.32 E$138.IN2
S$75
  Top 1.93: E$130.APLUS 142.24,17.78 142.24,15.24 E$139.IN1 E$140.IN1
S$76  (via drill 0.6)
  Top 1.93: E$130.AOUT v142.24,22.86 139.7,22.86 E$138.IN1 E$141.IN1
S$77
  Top 1.93: 137.16,10.16 E$130.BMINUS | 137.16,10.16 132.08,10.16 132.08,17.78 E$141.IN2 | 137.16,10.16 E$142.IN1
S$78
  Top 1.93: E$142.IN2 137.16,7.62 E$130.BOUT
S$79
  Top 1.93: E$130.BPLUS E$143.IN1 E$144.IN1
S$81
  Top 1.93: E$131.P$3 E$145.IN2 E$146.IN2
S$82
  Top 1.93: E$147.IN2 144.78,53.34 E$146.IN1 144.78,48.26 E$148.P$1
S$83
  Top 1.93: E$150.P$1 E$149.IN1 142.24,43.18 E$148.P$2
S$84
  Top 1.93: E$152.P$1 139.7,33.02 E$151.IN2 139.7,38.1 E$165.IN1
S$85
  Top 1.93: E$154.P$1 E$153.IN1 144.78,35.56 E$152.P$2
S$86
  Top 1.93: E$154.P$2 E$155.IN1
S$87
  Top 1.93: E$164.IN1 E$150.P$2
S$88
  Top 1.93: E$134.IN2 E$135.IN1 137.16,55.88 E$136.IN2 E$137.IN1
S$89
  Top 1.93: 78.74,22.86 81.28,22.86 | 81.28,22.86 86.36,22.86 | 86.36,22.86 E$161.IN1 | 81.28,22.86 E$157.IN2 | 86.36,22.86 E$100.IN1
S$90
  Top 1.93: 78.74,10.16 88.9,10.16 E$162.IN1 E$161.IN2
S$91
  Top 1.93: E$162.IN2 88.9,7.62 78.74,7.62
S$92
  Top 1.93: 78.74,12.7 E$163.IN1 E$166.IN1
S$94
  Top 1.93: E$156.AOUT E$156.AMINUS
S$95
  Top 1.93: E$156.BOUT E$156.BMINUS 71.12,5.08
S$96
  Top 1.93: E$168.IN2 76.2,63.5 76.2,60.96 | E$167.P$1 76.2,60.96 | 76.2,60.96 E$169.P$1
S$97
  Top 1.93: E$169.P$2 83.82,60.96 E$170.IN1
S$98
  Top 1.93: E$167.P$3 E$174.IN2 E$175.IN2
S$99
  Top 1.93: E$176.IN2 86.36,53.34 E$175.IN1 86.36,48.26 E$177.P$1
S$100
  Top 1.93: E$179.P$1 E$178.IN1 83.82,43.18 E$177.P$2
S$101
  Top 1.93: E$181.P$1 81.28,33.02 E$180.IN2 81.28,38.1 E$186.IN1
S$102
  Top 1.93: E$183.P$1 E$182.IN1 86.36,35.56 E$181.P$2
S$103
  Top 1.93: E$183.P$2 E$184.IN1
S$104
  Top 1.93: E$185.IN1 E$179.P$2
S$105
  Top 1.93: E$170.IN2 E$171.IN1 78.74,55.88 E$172.IN2 E$173.IN1
S$152
  Top 1.93: E$130.VCC 147.32,15.24 147.32,2.54 134.62,2.54 | 134.62,2.54 E$140.IN2 | 129.54,2.54 134.62,2.54
S$157
  Top 1.93: E$143.IN2 144.78,5.08
VCC2  (via drill 0.6)  (1 unrouted)
  Top 1.93: E$94.P$3 E$97.IN2 E$99.IN2 E$93.IN2 v53.34,48.26 53.34,66.04 E$89.IN1 | E$73.VCC 53.34,15.24 53.34,2.54 | 53.34,2.54 v58.42,2.54 v66.04,2.54 v76.2,2.54 | 33.02,2.54 40.64,2.54 | 40.64,2.54 53.34,2.54 | 40.64,2.54 E$84.IN2 | 71.12,66.04 v71.12,48.26 E$121.IN2 E$127.IN2 E$125.IN2 E$122.P$3 | E$36.P$3 E$44.IN2 E$46.IN2 E$35.IN2 v17.78,48.26 17.78,66.04 | 33.02,2.54 E$49.IN2 | E$11.VCC 17.78,15.24 17.78,2.54 | 17.78,2.54 v22.86,2.54 33.02,2.54 | v2.54,2.54 v5.08,2.54 | v5.08,2.54 17.78,2.54 | v5.08,2.54 E$21.IN2 | 10.16,66.04 E$31.IN1 17.78,66.04 | 10.16,66.04 E$7.IN1 | 35.56,66.04 v35.56,48.26 E$64.IN2 E$70.IN2 E$68.IN2 E$65.P$3 | E$102.IN1 v66.04,15.24 60.96,15.24 60.96,17.78 E$73.CPLUS | v83.82,15.24 E$159.IN1 E$156.CPLUS | v76.2,2.54 v83.82,2.54 | 27.94,66.04 17.78,66.04 | 27.94,66.04 E$38.IN1 | 27.94,66.04 E$60.IN1 35.56,66.04 | 45.72,66.04 35.56,66.04 | 45.72,66.04 E$76.IN1 | E$89.IN1 45.72,66.04 | 63.5,66.04 E$89.IN1 | 63.5,66.04 E$111.IN1 | 63.5,66.04 E$117.IN1 71.12,66.04 | 81.28,66.04 E$168.IN1 | E$179.P$3 E$182.IN2 E$184.IN2 E$178.IN2 88.9,66.04 E$174.IN1 81.28,66.04 | 81.28,66.04 71.12,66.04 | E$156.VCC 73.66,15.24 73.66,2.54 v76.2,2.54 | 10.16,66.04 v2.54,66.04
  Bottom 1.93: v66.04,2.54 v66.04,15.24 | v83.82,2.54 v83.82,15.24
VCC3
  Top 1.93: E$132.IN1 139.7,66.04 E$145.IN1 147.32,66.04 E$149.IN2 E$155.IN2 E$153.IN2 E$150.P$3

## Text on the board
Unrouted: Ir PhotoTrans | GND | VCC | X | X | X
tPlace: 3906 | 3906 | 3906 | 3906 | 3906 | 3904 | 3906 | 3904 | 3906 | 3904 | 3906 | 3904 | 3906 | 3904 | 3906 | 3904 | 3906 | 3904 | 3904 | 3904 | 3904 | 3904 | 3904 | 3904 | 3904 | 3904 | 3904 | 3904 | 3904 | 3904 | 5K | 5K | 3904